# Altium PCB SL1 Xilinx Spartan-IIE PQ208 Rev1.02.PcbDoc (part 2 of 2)
Units mm, origin at the board's own origin, x right, y up, seen from the top; angles counter-clockwise.
Board outline 180.01 x 50.51 mm, 2 copper layers (Top Layer, Bottom Layer), stack 1.646 mm thick; 115 components, 126 nets, 642 pads, 225 vias.
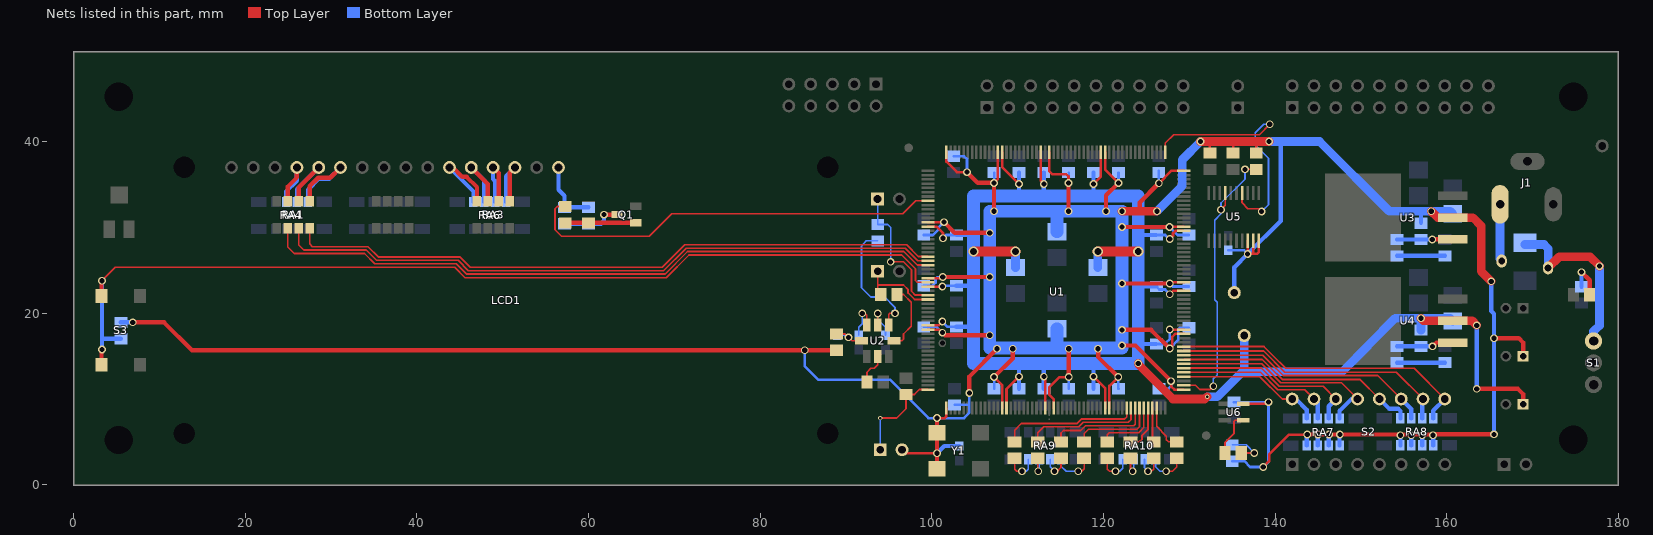
[diagram p2: the nets of this part, all layers, seen from the top]

## Via types
v1: diameter 0.9, hole 0.6, Top Layer to Bottom Layer, tented both sides, 166 vias
v2: diameter 1.5, hole 0.8, Top Layer to Bottom Layer, tented both sides, 27 vias
v3: diameter 1.2, hole 0.8, Top Layer to Bottom Layer, 18 vias
v4: diameter 1.2, hole 0.8, Top Layer to Bottom Layer, tented both sides, 11 vias
v5: diameter 0.5, hole 0.3, Top Layer to Bottom Layer, tented both sides, 2 vias
v6: diameter 0.9, hole 0.6, Top Layer to Bottom Layer, 1 vias

## Nets (pads, with @x,y where several pads share a name; then routed paths per layer and width w, separated by ;. In a path a pad name is that pad's centre, name@x,y a point inside that pad or via, vN(x,y) a via of type N, cw(c..) or ccw(c..) an arc to the next point about the centre after c; other vN are vias at no path point) (continued)
LCD_DB#4: LCD1.11 RA3.4 RA6.5 | length 11
  Top Layer w0.5: LCD1.11@43.8,37 44.2,37 45.297,35.903 45.797,35.903 46.995,34.705 RA3.4@46.995,33.075
  Bottom Layer w0.5: LCD1.11@43.8,37 46.595,34.205 RA6.5@46.595,32.975
LCD_DB#5: LCD1.12 RA3.3 RA6.6 | length 9.4
  Top Layer w0.5: LCD1.12@46.34,37 48.265,35.075 RA3.3@48.265,33.075
  Bottom Layer w0.5: LCD1.12@46.34,37 47.865,35.475 RA6.6@47.865,32.975
LCD_DB#6: LCD1.13 RA3.2 RA6.7 | length 8.3
  Top Layer w0.5: LCD1.13@48.88,37 49.535,36.345 RA3.2@49.535,33.075
  Bottom Layer w0.5: LCD1.13@48.88,37 48.88,35.655 49.135,35.4 RA6.7@49.135,32.975
LCD_DB#7: LCD1.14 RA3.1 RA6.8 | length 8.6
  Top Layer w0.5: RA3.1@50.805,33.075 50.805,36.385 LCD1.14@51.42,37
  Bottom Layer w0.5: RA6.8@50.405,32.975 50.405,35.985 LCD1.14@51.42,37
LCD_E: RA1.8 U1.21 | length 76.7
  Top Layer w0.2: RA1.8@27.505,29.925 27.505,28.095 27.825,27.775 34.3,27.775 35.5,26.575 45,26.575 46.2,25.375 68.575,25.375 71.2,28 97.059,28 98.434,26.625 U1.21@99.55,26.625
LCD_E#: LCD1.6 RA1.1 RA4.8 | length 12.5
  Top Layer w0.5: RA1.1@27.505,33.075 27.505,34.805 28.5,35.8 29.9,35.8 LCD1.6@31.1,37
  Bottom Layer w0.5: RA4.8@27.305,32.975 27.305,34.405 28.595,35.695 29.795,35.695 LCD1.6@31.1,37
LCD_LIGHT: R2.1 U1.8 | length 49.2
  Top Layer w0.2: R2.1@57.3,32.45 56.375,32.45 56.1,32.175 56.1,29.725 56.85,28.975 67.084,28.975 69.709,31.6 96.6,31.6 98.125,33.125 U1.8@99.55,33.125
LCD_RS: RA1.6 U1.23 | length 79.8
  Top Layer w0.2: RA1.6@24.965,29.925 24.965,27.735 25.725,26.975 33.9,26.975 35.1,25.775 44.6,25.775 45.8,24.575 68.907,24.575 71.532,27.2 96.725,27.2 98.3,25.625 U1.23@99.55,25.625
LCD_RS#: LCD1.4 RA1.3 RA4.6 | length 8.9
  Top Layer w0.5: RA1.3@24.965,33.075 24.965,34.79 26.02,35.845 LCD1.4@26.02,37
  Bottom Layer w0.5: RA4.6@24.765,32.975 24.765,34.195 26.02,35.45 LCD1.4@26.02,37
LCD_RW: RA1.7 U1.22 | length 78.2
  Top Layer w0.2: RA1.7@26.235,29.925 26.235,27.965 26.825,27.375 34.1,27.375 35.3,26.175 44.8,26.175 46,24.975 68.741,24.975 71.366,27.6 96.894,27.6 98.369,26.125 U1.22@99.55,26.125
LCD_RW#: LCD1.5 RA1.2 RA4.7 | length 10
  Top Layer w0.5: RA1.2@26.235,33.075 26.235,34.675 LCD1.5@28.56,37
  Bottom Layer w0.5: RA4.7@26.035,32.975 26.035,34.475 LCD1.5@28.56,37
LEDS0: LED0.1 U1.102 | length 5.5
  Top Layer w0.2: U1.102@126.2,8.975 126.2,6.825 127.325,5.7 127.325,5.275 127.575,5.025 LED0.1@128.55,5.025
LEDS1: LED1.1 U1.101 | length 4
  Top Layer w0.2: U1.101@125.7,8.975 125.7,8.875 125.7,5.175 LED1.1@125.85,5.025
LEDS2: LED2.1 U1.100 | length 5.4
  Top Layer w0.2: LED2.1@123.15,5.025 124.175,5.025 124.5,5.35 124.5,5.775 125.2,6.475 U1.100@125.2,8.975
LEDS3: LED3.1 U1.99 | length 7.7
  Top Layer w0.2: LED3.1@120.45,5.025 120.45,5.875 120.675,6.1 124.1,6.1 124.7,6.7 U1.99@124.7,8.975
LEDS4: LED4.1 U1.98 | length 9.9
  Top Layer w0.2: LED4.1@117.75,5.025 117.75,6 118.25,6.5 123.9,6.5 124.2,6.8 U1.98@124.2,8.975
LEDS5: LED5.1 U1.97 | length 12
  Top Layer w0.2: LED5.1@115.05,5.025 115.05,6.05 115.35,6.35 117.35,6.35 117.9,6.9 123.525,6.9 123.7,7.075 U1.97@123.7,8.975
LEDS6: LED6.1 U1.96 | length 13.9
  Top Layer w0.2: LED6.1@112.35,5.025 112.35,6.075 113.05,6.775 117.125,6.775 117.65,7.3 122.9,7.3 123.2,7.6 U1.96@123.2,8.975
LEDS7: LED7.1 U1.95 | length 16.1
  Top Layer w0.2: LED7.1@109.65,5.025 109.65,6.375 110.45,7.175 116.959,7.175 117.484,7.7 122.475,7.7 122.7,7.925 U1.95@122.7,8.975
M0: JP5.1 R7.2 U1.52 | length 11.6
  Top Layer w0.2: v5(94,7.8) 95.9,7.8 96.989,8.889 96.989,10.555 97.98,10.555 98.55,11.125 U1.52@99.55,11.125
  Bottom Layer w0.2: JP5.1@94,4.1 v5(94,7.8)
NetC15_1: C15.1 R11.2 U2.8 | length 4.6
  Top Layer w0.2: R11.2@88.88,17.6 89.9,17.6 90.7,16.8 U2.8@91.8,16.8
  Bottom Layer w0.2: C15.1@89,17.45 89.78,17.45 v1(90.3,17.2)
NetC16_1: C16.1 U2.6 | length 4.2
  Top Layer w0.2: U2.6@93.697,18.663 93.702,18.668 v1(93.702,19.988)
  Bottom Layer w0.2: v1(93.702,19.988) 93.702,19.28 94.6,18.383 C16.1@94.6,17.45
NetC19_1: C19.1 U2.7 | length 4.5
  Top Layer w0.2: v1(91.9,20) 92.2,20 92.43,19.77 U2.7@92.43,18.65
  Bottom Layer w0.2: C19.1@91.5,17.45 91.5,18.392 91.9,18.792 v1(91.9,20)
NetD1_2: D1.2 F1.2 S1.3 | length 21.2
  Top Layer w1: F1.2@171.8,25.3 173.1,26.6 176.7,26.6 v1(177.8,25.5)
  Bottom Layer w1: D1.2@169.1,28.022 171.325,28.025 171.8,27.55 F1.2@171.8,25.3 ; S1.3@177.1,16.78 177.1,17.9 177.8,18.58 v1(177.8,25.5)
NetLCD1_16: LCD1.16 R8.1 R9.1 | length 7.7
  Bottom Layer w0.5: LCD1.16@56.5,37 56.5,34.4 57.2,33.7 57.2,32.35 R9.1@60,32.35
NetLED0_2: LED0.2 RA10.5 | length 5.5
  Top Layer w0.2: v1(127.3,1.6) 128.05,1.6 128.55,2.1 LED0.2@128.55,3.125
  Bottom Layer w0.2: RA10.5@126.055,3 126.055,2.125 126.58,1.6 ; 126.58,1.6 v1(127.3,1.6) 126.58,1.6
NetLED1_2: LED1.2 RA10.6 | length 3.6
  Top Layer w0.2: v1(125.2,1.6) 125.6,1.6 125.85,1.85 LED1.2@125.85,3.125
  Bottom Layer w0.2: RA10.6@124.785,3 124.785,2.015 v1(125.2,1.6)
NetLED2_2: LED2.2 RA10.7 | length 3.1
  Top Layer w0.2: LED2.2@123.15,3.125 123.15,1.85 v1(123.4,1.6)
  Bottom Layer w0.2: v1(123.4,1.6) 123.515,1.715 RA10.7@123.515,3
NetLED3_2: LED3.2 RA10.8 | length 4.4
  Top Layer w0.2: LED3.2@120.45,3.125 120.45,1.85 120.7,1.6 v1(121.4,1.6)
  Bottom Layer w0.2: v1(121.4,1.6) 121.9,1.6 122.245,1.945 RA10.8@122.245,3
NetLED4_2: LED4.2 RA9.5 | length 5.1
  Top Layer w0.2: v1(117.055,1.6) 117.45,1.6 117.75,1.9 LED4.2@117.75,3.125
  Bottom Layer w0.2: RA9.5@115.055,3 115.055,2.2 115.655,1.6 v1(117.055,1.6)
NetLED5_2: LED5.2 RA9.6 | length 3.6
  Top Layer w0.2: v1(114.3,1.6) 114.6,1.6 115.05,2.05 LED5.2@115.05,3.125
  Bottom Layer w0.2: RA9.6@113.785,3 113.785,2.115 v1(114.3,1.6)
NetLED6_2: LED6.2 RA9.7 | length 3
  Top Layer w0.2: LED6.2@112.35,3.125 112.35,1.65 v1(112.4,1.6)
  Bottom Layer w0.2: v1(112.4,1.6) 112.515,1.715 RA9.7@112.515,3
NetLED7_2: LED7.2 RA9.8 | length 4.2
  Top Layer w0.2: LED7.2@109.65,3.125 109.65,1.85 109.9,1.6 v1(110.5,1.6)
  Bottom Layer w0.2: v1(110.5,1.6) 111,1.6 111.245,1.845 RA9.8@111.245,3
NetLED8_1: LED8.1 R20.1 | length 4.5
  Top Layer w0.2: LED8.1@136.05,3.725 v1(137.575,3.725)
  Bottom Layer w0.2: R20.1@135,4.675 136.625,4.675 v1(137.575,3.725)
NetLED8_2: LED8.2 U6.4 | length 5.2
  Top Layer w0.2: LED8.2@134.15,3.725 134.15,4.925 135.2,5.975 135.2,7.4 135.35,7.55 U6.4@136.275,7.55
NetLED9_1: LED9.1 R15.1 | length 4.7
  Top Layer w0.5: v1(175.7,24.8) 176.65,23.85 LED9.1@176.65,22.15
  Bottom Layer w0.5: R15.1@175.7,23.1 v1(175.7,24.8)
NetQ1_1: Q1.1 R2.2 R3.2 | length 8.2
  Top Layer w0.5: R2.2@57.3,30.55 Q1.1@65.5,30.55
NetQ1_3: Q1.3 R8.2 R9.2 | length 6.9
  Top Layer w0.5: v1(61.8,31.5) Q1.3@63.3,31.5
  Bottom Layer w0.5: R8.2@57.2,30.45 61.45,30.45 61.8,30.8 v1(61.8,31.5)
NetR10_2: R10.2 U2.2 | length 3.7
  Top Layer w0.2: R10.2@92.45,12 92.45,13.15 92.9,13.6 93.28,13.6 93.7,14.02 U2.2@93.7,14.95
NetR12_1: R12.1 R13.2 U3.1 | length 6.5
  Top Layer w0.5: v1@158.32,28.62 U3.1@160.7,28.62
  Bottom Layer w0.5: R12.1@154.2,28.6 157,28.6 v1(158.3,28.6)
NetR12_2: R12.2 R14.2 | length 5.6
  Bottom Layer w0.5: R12.2@154.2,26.7 R14.2@159.8,26.7
NetR17_1: R17.1 R18.2 U4.1 | length 6.7
  Top Layer w0.5: v1(158.35,16.15) 158.8,16.6 U4.1@160.7,16.6
  Bottom Layer w0.5: R17.1@154.2,16.15 v1(158.35,16.15)
NetR17_2: R17.2 R19.1 | length 5.6
  Bottom Layer w0.5: R17.2@154.2,14.25 R19.1@159.8,14.25
PROG_B: R6.2 U1.106 U5.7 | length 34.3
  Top Layer w0.2: U1.106@129.35,11.625 130.725,11.625 131.225,11.125 132.425,11.125 v1(132.8,11.5) ; v1(133.7,32.075) 134.2,32.575 U5.7@134.2,34 ; v1(136.5,36.775) R6.2@137.8,36.775
  Bottom Layer w0.2: v1(132.8,11.5) 132.8,12.359 133.25,12.809 133.25,21.297 132.975,21.572 132.975,30.867 133.7,31.592 133.7,32.85 136.5,35.65 v1(136.5,36.775)
PWR_IN: F1.1 J1.1 | length 7.9
  Bottom Layer w1: J1.1@166.2,33.95 166.2,26.35 F1.1@166.4,26.1
SW0: RA7.1 S2.16 U1.108 | length 17.8
  Top Layer w0.2: U1.108@129.35,12.625 138.225,12.625 140.83,10.02 S2.16@142,10.02
  Bottom Layer w0.5: S2.16@142,10.02 142.43,10.02 143.695,8.755 143.695,7.755 143.7,7.75 143.7,8.63
SW1: RA7.2 S2.15 U1.109 | length 20.6
  Top Layer w0.2: U1.109@129.35,13.125 138.3,13.125 140.325,11.1 143.46,11.1 S2.15@144.54,10.02
  Bottom Layer w0.5: S2.15@144.54,10.02 144.97,9.59 RA7.2@144.97,7.75 ; RA7.2@144.965,7.875 S2.15@144.965,9.595
SW2: RA7.3 S2.14 U1.110 | length 21.8
  Top Layer w0.2: U1.110@129.35,13.625 138.375,13.625 140.5,11.5 145.6,11.5 S2.14@147.08,10.02
  Bottom Layer w0.5: RA7.3@146.24,7.75 146.24,9.18 S2.14@147.08,10.02
SW3: RA7.4 S2.13 U1.111 | length 25.5
  Top Layer w0.2: U1.111@129.35,14.125 138.441,14.125 140.666,11.9 147.74,11.9 S2.13@149.62,10.02
  Bottom Layer w0.5: RA7.4@147.51,7.75 147.51,8.635 148.895,10.02 S2.13@149.62,10.02
SW4: RA8.1 S2.12 U1.112 | length 28.6
  Top Layer w0.2: U1.112@129.35,14.625 138.506,14.625 139.447,13.685 140.831,12.3 149.88,12.3 152.16,10.02 S2.12@152.13,10.02
  Bottom Layer w0.5: S2.12@152.16,10.02 153.309,8.871 154.346,8.871 154.6,8.617 RA8.1@154.6,7.75
SW5: RA8.2 S2.11 U1.113 | length 30.2
  Top Layer w0.2: U1.113@129.35,15.125 138.572,15.125 139.506,14.191 140.947,12.75 151.97,12.75 S2.11@154.7,10.02
  Bottom Layer w0.5: S2.11@154.7,10.02 155.87,8.85 RA8.2@155.87,7.75
SW6: RA8.3 S2.10 U1.114 | length 32.5
  Top Layer w0.2: U1.114@129.35,15.625 138.638,15.625 141.113,13.15 154.11,13.15 S2.10@157.24,10.02
  Bottom Layer w0.5: RA8.3@157.14,7.75 157.14,9.92 S2.10@157.24,10.02
SW7: RA8.4 S2.9 U1.115 | length 35.8
  Top Layer w0.2: U1.115@129.35,16.125 138.703,16.125 139.695,15.133 141.228,13.6 156.2,13.6 S2.9@159.78,10.02
  Bottom Layer w0.5: RA8.4@158.41,7.75 158.41,8.65 S2.9@159.78,10.02
TDI_C: U1.157 U5.4 | length 30.2
  Top Layer w0.2: U1.157@127.2,38.775 127.2,39.85 128.175,40.825 138.175,40.825 v1(139.375,42.025) ; U5.4@136.15,34 136.15,32.875 136.825,32.2 138.107,32.2 v1(138.43,31.877)
  Bottom Layer w0.2: v1(138.43,31.877) 139.225,32.672 139.225,38.065 137.7,39.59 137.7,41.05 138.675,42.025 v1(139.375,42.025)
TEST: R16.2 S3.1 S3.2 U1.27 | length 114.4
  Top Layer w0.2: v1(3.3,23.8) 4.865,25.365 44.4,25.365 45.615,24.15 69.05,24.15 71.7,26.8 96.5,26.8 98.1,25.2 98.1,23.825 98.3,23.625 U1.27@99.55,23.625
  Top Layer w0.5: S3.1@3.25,13.99 3.25,15.75 v1(3.3,15.8) ; S3.2@3.25,22 v1@3.25,23.75
  Bottom Layer w0.5: v1(3.3,15.8) v1(3.3,23.8) ; 3.3,17.05 R16.2@5.5,17.05
VCCINT: C3.1 C7.1 C8.1 C10.1 C20.1 C21.1 C25.1 C26.1 C28.1 C29.1 C30.1 C32.1 C34.2 C38.1 C39.1 C41.1 R18.1 TP3.1 U1.14 U1.28 U1.37 U1.67 U1.76 U1.90 U1.119 U1.128 U1.142 U1.172 U1.186 U1.195 U4.2 | length 236.6
  Top Layer w0.3: U1.37@99.548,18.613 100.788,18.613 v1(101.225,19.05) ; U1.28@99.548,23.113 v1@101.225,23.113 ; U1.14@99.548,30.113 100.537,30.113 101.3,29.35 v1(101.3,28.75) ; U1.195@108.198,38.763 108.198,37.027 v1(110.15,35.075) ; U1.67@108.698,8.963 108.698,11.173 v1(110.15,12.625) ; U1.186@112.698,38.763 112.698,35.427 v1(113.05,35.075) ; v1(113.05,12.625) 113.198,12.477 U1.76@113.198,8.963 ; v1(118.85,12.625) 120.198,11.277 U1.90@120.198,8.963 ; v1(118.85,35.075) 119.698,35.923 U1.172@119.698,38.763 ; v1@127.725,18.113 U1.119@129.348,18.113 ; v1(127.725,22.225) 128.113,22.613 U1.128@129.348,22.613 ; v1(127.725,28.65) 128.1,29.025 128.1,29.318 128.395,29.613 U1.142@129.348,29.613
  Top Layer w0.5: v1(163.5,11.2) 168.3,11.2 168.9,10.6 C3.1@168.9,9.4
  Top Layer w1: v1(124.05,14.175) 124.15,13.975 128.106,10.019 131.819,10.019 v5(132.075,10.275) ; v1(157,19.425) 157.285,19.14 162.96,19.14 v1(163.5,18.6)
  Top Layer w1.2: v4(104.85,27.2) v4(109.75,27.2) ; v4(119.35,27.2) v4(124.05,27.2)
  Bottom Layer w0.3: v1(101.225,19.05) 101.85,18.425 C32.1@102.85,18.425 ; v1(101.225,23.125) 101.225,23.225 C25.1@102.85,23.225 ; v1(101.3,28.75) 101.675,29.125 C20.1@102.85,29.125 ; C34.2@126.15,16.425 127.121,16.425 ; C26.1@126.15,23.125 126.5,22.775 127.175,22.775 v1(127.725,22.225) ; C21.1@126.15,29.125 127.175,29.125 127.65,28.65 v1(127.725,28.65) ; 127.111,16.436 127.21,16.535 ; 127.222,16.522 127.725,17.025 v1(127.725,18.125)
  Bottom Layer w0.5: C32.1@102.85,18.425 104.85,18.425 ; C25.1@102.85,23.225 104.85,23.225 ; C20.1@102.85,29.125 104.85,29.125 ; C38.1@110.15,11.225 v1(110.15,12.625) 110.15,13.975 ; 110.15,33.8 v1(110.15,35.075) C7.1@110.15,36.4 ; C39.1@113.05,11.225 113.05,13.975 ; 113.05,33.8 C8.1@113.05,36.4 ; C41.1@118.85,11.225 118.85,13.975 ; 118.85,33.8 C10.1@118.85,36.4 ; 124.05,16.425 C34.2@126.15,16.425 ; 124.05,23.125 C26.1@126.15,23.125 ; 124.05,29.125 C21.1@126.15,29.125 ; v1(163.5,11.2) v1(163.5,18.6)
  Bottom Layer w1: C28.1@109.75,25.325 v4(109.75,27.2) ; C29.1@119.35,25.325 v4(119.35,27.2) ; v5(132.075,10.275) 133.275,10.275 136.175,13.175 147.8,13.175 153.975,19.425 160.375,19.425 C30.1@160.7,19.1 ; 136.4,13.175 TP3.1@136.4,17.4 ; R18.1@157,18.05 v1(157,19.425)
  Bottom Layer w1.5: 104.85,14.175 v1(124.05,14.175) 124.05,33.675 118.85,33.675 104.85,33.675 v4(104.85,27.2) 104.85,14.175
VCCO: C2.1 C4.1 C5.2 C6.1 C9.1 C11.1 C12.1 C14.1 C17.2 C18.2 C22.2 C23.1 C24.2 C31.1 C33.1 C35.1 C36.2 C37.1 C40.1 C42.1 C43.1 C44.2 C45.1 JP5.2 R4.1 R5.1 R6.1 R11.1 R13.1 R16.1 R20.2 RA7.5 RA7.6 RA7.7 RA7.8 RA8.5 RA8.6 RA8.7 RA8.8 TP2.1 U1.13 U1.26 U1.38 U1.53 U1.66 U1.78 U1.91 U1.105 U1.118 U1.130 U1.143 U1.156 U1.171 U1.184 U1.196 U1.208 U3.2 U5.18 U5.19 U5.20 U6.5 Y1.1 Y1.4 | length 536.7
  Top Layer w0.3: JP5.2@96.54,4.1 96.94,3.7 v1(100.6,3.7) ; U1.38@99.548,18.113 100.862,18.113 v1@101.525,17.45 ; U1.26@99.548,24.113 101.163,24.113 v1(101.275,24.225) v1@101.4,24.225 ; U1.13@99.548,30.613 v1@101.425,30.613 ; v1(100.6,7.8) 101.5,7.8 101.698,7.998 U1.53@101.698,8.963 ; U1.208@101.698,38.763 101.698,37.677 102.925,36.45 v1(104.1,36.45) ; v1(107.25,12.575) 108.198,11.627 U1.66@108.198,8.963 ; v1(107.25,35.2) 107.698,35.648 U1.196@107.698,38.763 ; U1.184@113.698,38.763 113.698,36.552 114.025,36.225 115.65,36.225 115.925,35.95 v1(115.925,35.2) ; U1.78@114.198,8.963 114.198,10.002 113.7,10.5 113.7,11.4 114.875,12.575 v1(115.95,12.575) ; U1.171@120.198,38.763 120.198,36.752 v1(121.75,35.2) ; U1.91@120.698,8.963 120.698,11.548 v1(121.725,12.575) ; v1(126.45,35.15) 127.925,36.625 U1.156@129.35,36.625 ; v1(127.7,30.05) 127.7,30.113 U1.143@129.348,30.113 ; v1(127.725,15.9) 128.017,16.192 128.017,17.273 128.357,17.613 U1.118@129.348,17.613 ; v1(127.725,23.475) v1@127.875,23.625 ; v1(127.875,12.1) 127.875,11.5 128.262,11.113 U1.105@129.348,11.113 ; v1@127.887,23.613 U1.130@129.348,23.613 ; R4.1@132.4,38.675 132.4,39.85 ; R5.1@135.1,38.675 135.1,39.85 ; U6.5@136.275,9.45 139.025,9.45 v1(139.225,9.65) ; U5.18@136.8,28.45 v1(136.8,26.925) 137.9,26.925 138.1,27.125 U5.20@138.1,28.45 ; 137.45,26.925 U5.19@137.45,28.45 ; R6.1@137.8,38.675 137.8,40.075 137.825,40.1 ; v1(138.625,2.1) 139.298,2.773 139.298,3.558 141.615,5.875 v1(143.735,5.875)
  Top Layer w0.5: v1(6.9,18.95) 10.55,18.95 13.8,15.7 v1(85.2,15.7) R11.1@88.88,15.7 ; Y1.1@100.6,1.6 v1(100.6,7.8) ; v1(101.275,24.225) v1(106.75,24.225) ; v1(101.425,30.625) 102.675,29.375 v1(106.75,29.375) ; v1@101.525,17.45 v1(106.75,17.45) ; v1(104.1,36.45) 105.35,35.2 v1(107.25,35.2) v1(107.25,31.9) ; v1(104.375,10.725) 104.375,12.65 v1(107.6,15.875) ; v1(107.25,12.575) 109.425,14.75 v1(109.425,15.875) ; v1(115.925,31.9) v1(115.925,35.2) ; v1(115.95,12.575) v1(115.95,15.875) ; v1(119.375,15.875) 119.375,14.925 v1(121.725,12.575) ; v1(120.3,31.9) 120.3,33.75 v1(121.75,35.2) ; v1(122.15,16.25) 123.725,16.25 v1(127.875,12.1) ; v1(122.15,18.075) 125.55,18.075 v1(127.725,15.9) ; v1(122.15,23.475) v1(127.725,23.475) ; v1(122.15,30.05) v1(127.7,30.05) ; 124.225,31.9 124.225,32.925 v1(126.45,35.15) ; v1(131.3,40.025) 131.55,39.85 137.55,39.85 ; v1(143.735,5.875) v1@158.445,5.875 ; v1(158.4,5.8) 158.5,5.9 v1(165.5,5.9) ; v1(165.5,17.1) 168.4,17.1 168.9,16.6 C2.1@168.9,15
  Top Layer w1: v1(122.15,31.9) v1(126.225,31.9) ; v1(131.3,40.025) v1(139.3,40.025) ; v1(158.2,31.9) 158.94,31.16 163.04,31.16 164,30.2 164,24.9 v1(165.175,23.725)
  Bottom Layer w0.3: v1(85.2,15.7) 85.2,13.825 86.75,12.275 95.15,12.275 99.6,7.8 103.75,7.8 104.375,8.425 v1(104.375,10.725) ; C31.1@99.05,18.425 100.55,18.425 v1(101.225,17.75) ; C22.2@99.05,23.225 100.075,23.225 100.425,23.575 100.425,23.975 100.675,24.225 v1(101.275,24.225) ; C17.2@99.05,29.125 100.125,29.125 100.725,29.725 100.725,29.925 v1(101.425,30.625) ; C5.2@102.55,38.3 103.775,38.3 104.1,37.975 v1(104.1,36.45) ; C36.2@102.65,9.325 104.375,9.325 ; C37.1@107.25,11.225 v1(107.25,12.575) ; v1(107.25,35.2) C6.1@107.25,36.4 ; v1(115.925,35.2) C9.1@115.95,36.4 ; C40.1@115.95,11.225 v1(115.95,12.575) ; v1(121.725,12.575) 121.725,11.25 C42.1@121.75,11.225 ; v1(121.75,35.2) C11.1@121.75,36.4 ; C43.1@126.45,11.225 127.575,11.225 127.875,11.525 v1(127.875,12.1) ; v1(126.45,35.15) C12.1@126.45,36.625 ; v1(127.7,30.05) 128.625,29.125 C18.2@129.95,29.125 ; v1(127.725,15.9) 128.7,16.875 128.7,18.125 128.9,18.325 C35.1@129.95,18.325 ; v1(127.725,23.475) 128.075,23.125 C24.2@129.95,23.125 ; C4.1@134.525,27.35 136.375,27.35 v1(136.8,26.925) ; R20.2@135,2.775 136.425,2.775 137.1,2.1 v1(138.625,2.1) 139.225,2.7 v1(139.225,9.65) C44.2@135.2,9.65
  Bottom Layer w0.5: R16.1@5.5,18.95 v1(6.9,18.95) ; v1(100.6,3.7) 101.45,4.55 C45.1@103.2,4.55 ; TP2.1@135.233,22.4 135.233,25.358 v1(136.8,26.925) 140.65,30.75 140.65,40.025 v1(139.3,40.025) ; RA7.8@143.7,4.6 v1@143.7,5.84 ; RA7.7@144.97,4.6 v1@144.97,5.84 ; RA7.6@146.24,4.6 v1@146.24,5.84 ; RA7.5@147.51,4.6 v1@147.51,5.84 ; RA8.8@154.6,4.6 v1@154.6,5.84 ; RA8.7@155.87,4.6 v1@155.87,5.84 ; R13.1@157,30.55 157,31.925 ; RA8.6@157.14,4.6 v1@157.14,5.84 ; RA8.5@158.41,4.6 v1@158.41,5.84 ; v1(165.175,23.725) 165.175,20.275 165.5,19.95 v1(165.5,17.1) v1(165.5,5.9)
  Bottom Layer w1: v1(126.225,31.9) 129.175,34.85 129.175,37.9 v1(131.3,40.025) ; v1(139.3,40.025) 145.175,40.025 153.3,31.9 160.4,31.9 C14.1@160.7,31.6
  Bottom Layer w1.5: 114.6,16 C33.1@114.6,18.2 ; C23.1@114.6,29.5 114.6,31.9 ; 114.6,31.9 v1(122.15,31.9) 122.15,15.975 106.75,15.975 v1(106.75,17.45) v1(106.75,24.225) 106.75,31.9 v1(107.25,31.9) 114.6,31.9
  other v1: 154.59,5.8 155.86,5.8 157.13,5.8 145.005,5.875 146.275,5.875 147.545,5.875
XOUT: R22.2 U2.5 | length 15
  Top Layer w0.2: U2.5@94.97,18.65 94.97,19.57 94.97,19.87 95.1,20 v1(95.7,20)
  Bottom Layer w0.2: R22.2@93.711,28.455 92.355,28.455 91.8,27.8 91.8,23 92.9,21.9 94.514,21.9 95.7,20.714 v1(95.7,20) v1@95.4,20.3
XOUT_ALT: JP3.1 R22.1 U1.30 | length 16
  Top Layer w0.2: v1(95.2,26) 96.7,26 97.633,25.067 97.633,22.567 98.075,22.125 U1.30@99.55,22.125
  Bottom Layer w0.2: JP3.1@93.693,33.31 93.693,30.373 93.711,30.355 94.845,30.355 95.2,30 v1(95.2,26)
YOUT: R21.2 U2.4 | length 7.9
  Top Layer w0.2: U2.4@95.6,16.8 96.5,16.8 96.7,17 96.7,17.6 97.6,18.5 97.6,21.286 96.697,22.189 R21.2@95.945,22.189
YOUT_ALT: JP4.1 R21.1 U1.31 | length 9.6
  Top Layer w0.2: JP4.1@93.693,24.91 93.693,22.54 R21.1@94.045,22.189 ; 93.793,23.3 96.7,23.3 97.233,22.767 97.233,22.367 97.975,21.625 U1.31@99.55,21.625
pads on no net: HDR2.1 HDR3.1 LCD1.M1 LCD1.M2 LCD1.M3 LCD1.M4 RA1.4 RA1.5 RA4.5 RA4.STP RA5.STP RA6.STP RA7.STP RA8.STP RA9.STP RA10.STP U1.3 U1.24 U1.29 U1.33 U1.34 U1.35 U1.36 U1.40 U1.41 U1.42 U1.43 U1.44 U1.45 U1.46 U1.47 U1.48 U1.49 U1.55 U1.56 U1.57 U1.58 U1.59 U1.60 U1.61 U1.62 U1.63 U1.64 U1.68 U1.69 U1.70 U1.71 U1.73 U1.74 U1.75 U1.81 U1.82 U1.83 U1.84 U1.86 U1.87 U1.88 U1.89 U1.93 U1.94 U1.116 U1.139 U1.140 U1.141 U1.145 U1.146 U1.147 U1.148 U1.149 U1.150 U1.151 U1.152 U1.154 U1.192 U1.193 U1.194 U1.198 U1.199 U1.200 U1.201 U1.202 U1.203 U1.204 U1.205 U1.206 U1.FID1 U1.FID2 U2.0 U2.1 U3.4 U4.4 U5.2 U5.9 U5.12 U5.13 U5.14 U5.15 U5.16 U6.1

## Polygon pours and split planes (outlines as drawn)
GND on Top Layer "Top Layer-GND" (solid, remove dead copper, pour order 1000): 0,0 0,50.5 180,50.5 180,0
GND on Bottom Layer "Bottom Layer-GND" (solid, remove dead copper, pour order 1001): 179.995,0 179.995,50.5 -0.005,50.5 -0.005,0

## Keep-outs
Keep-Out Layer:
  circle w0.2: c174.75,45.25 r4
  circle w0.2: c5.25,45.25 r4
  circle w0.2: c174.75,5.275 r4
  circle w0.2: c5.25,5.25 r4
  lines w0.635: 0,0 180,0 180,50.5 0,50.5 0,0

## Silkscreen, mask and mechanical layers (free items; w line width, h text height)
Top Overlay:
  drawing of 3334 lines, arcs and shapes, not listed
  text "SL" at 54.182,46.321 h1.3
  text "REV 1.02" at 59.262,46.321 h1.3
  text "CONTRAST" at 1.9,26.6 h1
  text "PWR" at 179.324,20.574 h1.2 r90
  text "TEST/" at 3.6,11.5 h1
  text "RESET" at 3.4,9.8 h1
  text "7" at 109.6,6.5 h1.2
  text "6" at 112,6.5 h1.2
  text "5" at 114.7,6.5 h1.2
  text "4" at 117.3,6.5 h1.2
  text "3" at 120.1,6.5 h1.2
  text "2" at 122.7,6.5 h1.2
  text "1" at 125.5,6.5 h1.2
  text "0" at 128.1,6.5 h1.2
  text "DONE" at 132.968,0.946 h1.2
Unit PCB Boundary:
  lines w0.2: 0,0 0,50.5 180,50.5 180,0 0,0
  text "PCB boundary coincides with centre-line of tracks" at 0,-10 h0.75
Overlay boundary:
  lines w0.2: 0.508,0.508 179.492,0.508 179.5,50.025 0.508,50.038 0.508,0.508
  text "PCB boundary coincides with centre-line of tracks" at 0,-10 h0.75
LayerID:
  text ".Printout_Name" at 0,-6 h0.75
Dimensions:
  text "Dimensions in millimetres (mm)" at 0,-8 h0.75
Design Information:
  drawing of 719 lines, arcs and shapes, not listed
  text "Spirit Level Rev 1.01" at 282.247,157.974 h1.27
  text "DESIGN INFORMATION" at 226.24,157.847 h1.52
  text "BOARD NAME:" at 263.832,157.847 h1.52
  text "BOARD TECHNOLOGY" at 226.24,155.307 h1.52
  text "BOARD SIZE (REFER ALSO PROFILING INFORMATION)" at 274.5,155.307 h1.27
  text "50.50mm" at 282.22,153.033 h1.52
  text "15.000" at 242.039,152.945 h1.52
  text "180.00mm" at 305.22,152.933 h1.52
  text "7.874" at 256.009,152.818 h1.52
  text "7.874" at 229.066,152.767 h1.52
  text "(Unit)" at 321.29,152.709 h1.52
  text "X" at 298.169,152.259 h1.78
  text "(MIN. TRACK/   PADS  /CLEARANCE IN 0.001'')" at 224.716,150.227 h1.27
  text "MINIMUM ANNULAR RING 0.05MM (0.002'') EXTERNAL PER IPC-2221 CLASS 3 LEVEL C AND IS THE" at 226.24,147.687 h1.27
  text "MANUFACTURING REGISTRATION ALLOWANCE" at 226.24,145.401 h1.27
  text "LAND SIZE CALCULATION MINIMUM - NOMINAL HOLE SIZE + 0.508MM (0.020'')" at 226.24,142.607 h1.27
  text "AS INSTRUCTED" at 312.27,138.213 h1.52
  text "X" at 263.883,138.086 h1.52
  text "CIRCUIT TYPE:" at 226.24,138.035 h1.52
  text "SS" at 249.1,138.035 h1.27
  text "DS" at 266.88,138.035 h1.27
  text "X" at 281.485,138.035 h1.52
  text "PTH" at 284.66,138.035 h1.27
  text "ML" at 295.582,138.035 h1.27
  text "X" at 299.392,138.035 h1.52
  text "No. OFF" at 302.44,138.035 h1.27
  text "FINGER CONNECTOR DIM PER:" at 226.24,134.987 h1.52
  text "AS SHOWN" at 302.44,134.987 h1.27
  text "No. OFF TOTAL" at 243.004,132.193 h1.52
  text "ONE SIDE" at 284.66,132.193 h1.27
  text "BOTH SIDES" at 302.44,131.939 h1.27
  text "VIAS:" at 226.24,129.272 h1.52
  text "NONE" at 237.67,129.272 h1.14
  text "X" at 246.052,129.272 h1.52
  text "FEED THRU'" at 249.1,129.272 h1.14
  text "X" at 263.832,129.272 h1.52
  text "TENTED" at 266.88,129.272 h1.14
  text "BURIED LAYER SEQUENCE" at 284.66,129.272 h1.14
  text "UNIQUE DRILL" at 249.1,126.224 h1.14
  text "2 SIZE" at 266.88,126.224 h1.14
  text "BLIND LAYER SEQUENCE" at 284.66,126.224 h1.14
  text "Layer Stack Manager (Protel)" at 261.673,123.938 h1.27
  text "X" at 299.392,123.938 h1.52
  text "AS SHOWN" at 302.44,123.938 h1.27
  text "LAYER CONSTRUCTION PER:" at 226.24,123.811 h1.52
  text "Protel" at 307.266,121.271 h1.27
  text "(PFW)" at 317.553,121.144 h1.27
  text "ARTWORK:" at 226.24,121.017 h1.52
  text "MANUAL" at 249.1,121.017 h1.27
  text "DIGITISED" at 266.88,121.017 h1.27
  text "X" at 281.612,121.017 h1.52
  text "CAD" at 284.66,121.017 h1.27
  text "TYPE" at 295.582,121.017 h1.27
  text "ARTWORK/PATTERN MASTER LIST" at 226.24,116.318 h1.52
  text "DESCRIPTION" at 227.51,113.905 h1.27
  text "DRAWING No./CAD FILE REF." at 246.179,113.905 h1.27
  text "LAYER NAME" at 287.454,113.905 h1.27
  text "GERBER FILE REF" at 308.206,113.829 h1.27
  text "PCB FILE" at 225.956,111.441 h1.27
  text "SpiritLevel_2E_Rev1_01" at 246.327,111.365 h1.27
  text "PcbDoc" at 277.569,111.365 h1.02
  text "Top Paste Mask" at 285.748,108.901 h1.02
  text "GTP" at 328.369,108.825 h1.27
  text "GERBER FILE" at 225.956,108.774 h1.27
  text "GTO" at 328.318,106.336 h1.27
  text "Top Overlay" at 285.748,106.31 h1.02
  text "GERBER FILE" at 225.956,106.234 h1.27
  text "Top Solder Mask" at 285.748,103.872 h1.02
  text "GTS" at 328.369,103.745 h1.27
  text "GERBER FILE" at 225.956,103.694 h1.27
  text "TOP LAYER" at 285.748,101.281 h1.02
  text "GTL" at 328.369,101.205 h1.27
  text "GERBER FILE" at 225.956,101.154 h1.27
  text "BOTTOMLAYER" at 285.748,98.801 h1.02
  text "GBL" at 328.369,98.725 h1.27
  text "GERBER FILE" at 225.956,98.614 h1.27
  text "Bottom Solder Mask" at 285.748,96.312 h1.02
  text "GBS" at 328.369,96.185 h1.27
  text "GERBER FILE" at 225.956,96.074 h1.27
  text "Bottom Overlay" at 285.748,93.721 h1.02
  text "GBO" at 328.369,93.645 h1.27
  text "GERBER FILE" at 225.956,93.534 h1.27
  text "Bottom Paste Mask" at 285.748,91.232 h1.02
  text "GBP" at 328.369,91.105 h1.27
  text "GERBER FILE" at 225.956,90.994 h1.27
  text "PCB Boundary" at 285.748,88.641 h1.02
  text "GM1" at 328.369,88.565 h1.27
  text "GERBER FILE" at 225.956,88.454 h1.27
  text "Plated Route Details" at 285.748,86.121 h1.02
  text "GM2" at 328.369,86.045 h1.27
  text "GERBER FILE" at 225.956,85.914 h1.27
  text "APERTURE LIST" at 225.956,83.411 h1.27
  text "APR" at 278.569,83.335 h1.27
  text "DRILL REPORT" at 225.956,80.871 h1.27
  text "DRR" at 278.569,80.795 h1.27
  text "EXCELLON DRILL" at 225.956,78.331 h1.27
  text "TXT" at 278.569,78.255 h1.27
  text "MATERIAL:" at 226.24,55.231 h1.52
  text "GLASS FIBRE EPOXY RESIN NEMA GRADE FR4 (MIL-S-13949H)" at 251.894,54.977 h1.27
  text "X" at 249.227,54.85 h1.52
  text "THICKNESS:" at 234.114,52.056 h1.27
  text "0.8mm" at 251.894,52.056 h1.27
  text "1.2mm" at 269.547,52.056 h1.27
  text "1.6mm" at 287.2,52.056 h1.27
  text "2.4mm" at 304.98,52.056 h1.27
  text "3.2mm" at 322.76,52.056 h1.27
  text "X" at 284.787,51.929 h1.52
  text "TOLERANCE:" at 233.987,49.008 h1.27
  text "IN A/W IPC-D-300G CLASS" at 251.64,49.008 h1.27
  text "3 LEVEL B" at 286.565,49.008 h1.27
  text "OTHER +/-" at 304.98,49.008 h1.27
  text "X" at 249.227,48.881 h1.52
  text "BOW & TWIST:" at 231.574,45.96 h1.27
  text "IN A/W IPC-D-300G CLASS" at 251.64,45.96 h1.27
  text "3 LEVEL B" at 286.565,45.96 h1.27
  text "AS SHOWN" at 305.107,45.833 h1.27
  text "X" at 249.227,45.706 h1.52
  text "COPPER THICKNESS (FINISHED)" at 233.987,42.658 h1.27
  text "OUTER:" at 238.813,40.372 h1.27
  text "18um" at 251.894,40.372 h1.27
  text "35um" at 278.945,40.372 h1.27
  text "70um" at 305.234,40.372 h1.27
  text "X" at 276.202,40.169 h1.52
  text "INNER SIGNAL:" at 230.431,37.324 h1.27
  text "18um" at 251.894,37.324 h1.27
  text "35um" at 278.945,37.324 h1.27
  text "70um" at 305.234,37.324 h1.27
  text "INNER PWR:" at 234.114,34.276 h1.27
  text "18um" at 251.894,34.276 h1.27
  text "35um" at 278.945,34.276 h1.27
  text "70um" at 305.234,34.276 h1.27
  text "STRUCTURE:" at 226.24,31.228 h1.52
  text "REFER" at 251.894,31.228 h1.27
  text "AS PER DRAWING No." at 251.767,28.053 h1.27
  text "AS SHOWN" at 305.107,28.053 h1.27
  text "X" at 302.567,27.926 h1.52
  text "DRILLING:" at 226.24,25.259 h1.52
  text "VIEWED FROM:" at 231.193,22.973 h1.27
  text "COMPONENT SIDE" at 251.894,22.973 h1.14
  text "SOLDER SIDE" at 278.691,22.973 h1.14
  text "X" at 249.227,22.719 h1.52
  text "REFERENCE:" at 233.479,19.925 h1.27
  text "AS SHOWN" at 251.767,19.798 h1.14
  text "PATTERN MASTER LIST" at 278.818,19.798 h1.14
  text "X" at 302.567,19.798 h1.52
  text "NC_DRILL FILES" at 305.107,19.798 h1.14
  text "X" at 249.227,19.671 h1.52
  text "PTH MINIMUM COPPER THICKNESS:" at 239.321,16.877 h1.27
  text "20um" at 278.945,16.877 h1.27
  text "X" at 276.278,16.75 h1.52
  text "OTHER" at 305.107,16.75 h1.27
  text "NPTH:" at 239.829,13.829 h1.27
  text "TENTED" at 251.767,13.702 h1.14
  text "X" at 276.278,13.702 h1.52
  text "PADS REMOVED" at 278.818,13.702 h1.14
  text "REMOVE PADS" at 305.107,13.702 h1.14
  text "X" at 249.227,13.575 h1.52
  text "2nd DRILL" at 251.767,10.654 h1.14
  text "BOTH" at 278.818,10.654 h1.14
  text "AS SHOWN" at 291.137,10.654 h1.14
  text "NONE" at 305.107,10.654 h1.14
  text "BOARD FINISH:" at 226.24,7.733 h1.52
  text "X" at 249.227,7.606 h1.52
  text "ETCHING" at 251.767,7.606 h1.14
  text "REFER PATTERN MASTER LIST" at 278.818,7.606 h1.14
  text "LEGEND / SCREEN PRINT:" at 246.56,4.685 h1.27
  text "NONE" at 278.818,4.558 h1.14
  text "COMPONENT" at 291.137,4.558 h1.14
  text "SOLDER" at 305.107,4.558 h1.14
  text "X" at 288.597,4.431 h1.52
  text "X" at 302.567,4.431 h1.52
  text "COLOUR:" at 236.781,1.637 h1.27
  text "WHITE" at 251.767,1.51 h1.14
  text "YELLOW" at 278.818,1.51 h1.14
  text "OTHER" at 305.107,1.51 h1.14
  text "X" at 249.227,1.383 h1.52
  text "X" at 249.227,-1.538 h1.52
  text "LIQUID PHOTOIMAGEABLE" at 251.767,-1.538 h1.14
  text "SCREEN PRINT" at 291.137,-1.538 h1.14
  text "MATTE" at 251.767,-4.586 h1.14
  text "GLOSS" at 264.467,-4.586 h1.14
  text "GREEN" at 278.818,-4.586 h1.14
  text "BLUE" at 291.137,-4.586 h1.14
  text "G/Y" at 305.107,-4.586 h1.14
  text "OTHER" at 316.537,-4.586 h1.14
  text "X" at 261.8,-4.713 h1.52
  text "SOLDER MASK COLOUR:" at 226.24,-7.507 h1.14
  text "BLACK" at 251.767,-7.634 h1.14
  text "GREEN" at 264.467,-7.634 h1.14
  text "YELLOW" at 278.818,-7.634 h1.14
  text "BLUE" at 291.137,-7.634 h1.14
  text "OTHER" at 305.107,-7.634 h1.14
  text "X" at 249.1,-7.761 h1.52
  text "TRACK FINISH:" at 226.24,-10.555 h1.52
  text "SELECTIVE SOLDER (HASL)" at 251.767,-10.682 h1.14
  text "REFLOW SOLDER" at 291.137,-10.682 h1.14
  text "X" at 249.152,-10.757 h1.52
  text "SELECTIVE GOLD" at 251.767,-13.73 h1.14
  text "um  (AREA" at 278.818,-13.73 h1.14
  text "sq. mm)" at 306.631,-13.73 h1.14
  text "REFER PATTERN MASTER LIST" at 251.767,-16.778 h1.14
  text "OTHER" at 291.137,-16.778 h1.14
  text "EDGE BOARD" at 226.24,-19.699 h1.52
  text "1.3um HARD GOLD OVER 5um     NICKEL / TIN-NICKEL" at 251.767,-19.826 h1.14
  text "CONTACTS:" at 226.24,-21.858 h1.52
  text "HARD FINISH GOLDE PLATE" at 251.767,-22.874 h1.14
  text "OTHER" at 291.137,-22.874 h1.14
  text "AS SHOWN" at 251.767,-25.922 h1.14
  text "REFER" at 291.137,-25.922 h1.14
  text "PROFILING:" at 226.24,-28.97 h1.52
  text "AS DIMENSIONED, MEASURED AND CUT FROM SPECIFIED DATUM." at 251.767,-28.97 h1.14
  text "X" at 249.227,-29.097 h1.52
  text "REFER PCB BLANK DWG No." at 251.894,-31.891 h1.27
  text "USE PROFILE / ROUTE TAPE SUPPLIED (REFER PATTERN MASTER LIST)" at 251.894,-34.939 h1.27
  text "SQUARE CUT" at 251.894,-37.987 h1.27
  text "N.C. ROUTE" at 269.674,-37.987 h1.27
  text "V. SCORE" at 287.454,-37.987 h1.27
  text "BLANK" at 305.234,-37.987 h1.27
  text "ACCEPTABILITY:" at 226.24,-40.654 h1.52
  text "MATERIALS AND WORKMANSHIP FOR ALL PRINTED WIRING BOARDS TO MEET" at 248.465,-40.781 h1.27
  text "OR EXCEED THE REQUIREMENTS OF:" at 248.465,-43.575 h1.27
  text "IPC-6011/12 AND IPC-A-600E" at 252.021,-46.242 h1.27
  text "1" at 287.581,-46.242 h1.27
  text "2" at 296.471,-46.242 h1.27
  text "X" at 293.804,-46.369 h1.52
  text "X" at 249.354,-46.496 h1.52
  text "3" at 305.361,-48.401 h1.27
  text "UL CERTIFICATION" at 252.021,-49.29 h1.27
  text "AUSTEL" at 287.581,-49.29 h1.27
  text "X" at 249.354,-49.417 h1.52
  text "ML-P-55110F GRP" at 251.513,-52.338 h1.02
  text "A" at 269.801,-52.338 h1.27
  text "B" at 278.691,-52.338 h1.27
  text "AS2546" at 287.581,-52.338 h1.27
  text "OTHER" at 305.361,-52.338 h1.27
  text "ADDITIONAL" at 226.24,-55.259 h1.52
  text "NONE" at 252.021,-55.513 h1.27
  text "SAMPLE PLAN" at 269.801,-55.513 h1.27
  text "MIL-P-55110E SERIAL Nos. PER ORDER" at 287.581,-55.513 h1.27
  text "REQUIREMENTS:" at 226.24,-57.672 h1.52
  text "NONE" at 252.021,-58.561 h1.27
  text "ML-P-55110F GRP" at 269.293,-58.561 h1.02
  text "A" at 287.581,-58.561 h1.27
  text "B" at 296.471,-58.561 h1.27
  text "IPC CLASS:" at 302.44,-58.561 h1.27
  text "1" at 317.934,-58.561 h1.27
  text "2" at 324.284,-58.561 h1.27
  text "3" at 330.634,-58.561 h1.27
  text "QUALITY RELEASE REPORT" at 269.801,-61.609 h1.27
  text "OTHER" at 310.314,-61.609 h1.27
  text "PER ORDER" at 318.823,-61.736 h1.27
  text "X" at 307.647,-61.863 h1.52
  text "NONE" at 269.801,-64.657 h1.27
  text "REQUIRED" at 287.581,-64.657 h1.27
  text "PER ORDER" at 310.441,-64.657 h1.27
  text "ELECTRICAL TEST:" at 226.24,-64.784 h1.52
  text "X" at 284.914,-64.784 h1.52
  text "NONE" at 269.801,-67.705 h1.27
  text "1 SIDE" at 287.454,-67.705 h1.14
  text "2 SIDES" at 298.63,-67.705 h1.14
  text "MIN. PITCH" at 310.314,-67.705 h1.27
  text "0.65mm" at 323.903,-67.705 h1.27
  text "SURFACE MOUNT:" at 226.24,-67.832 h1.52
  text "X" at 296.395,-67.908 h1.52
  text "NONE" at 269.801,-70.753 h1.27
  text "FOIL" at 287.581,-70.753 h1.27
  text "LEGEND" at 299.011,-70.753 h1.27
  text "REFER" at 310.314,-70.753 h1.27
  text "MANUFACTURER'S ID/LOGO:" at 226.24,-70.88 h1.52
  text "ISO9001/AS3901" at 273.611,-73.801 h1.27
  text "NONE" at 310.314,-73.801 h1.27
  text "MANUFACTURER'S ACCREDITATION:" at 226.24,-73.928 h1.52
  text "X" at 270.944,-73.928 h1.52
  text "PER ORDER" at 269.801,-76.849 h1.27
  text "REFER" at 287.581,-76.849 h1.27
  text "PACKAGING AND HANDLING:" at 226.24,-76.976 h1.52
  text "X" at 267.134,-77.103 h1.52
WS Board Travel:
  lines w0.2: 84.42,-6.5 84.42,-8.4 86.32,-6.5 87,-6.5 ; 86.4,-8.4 88.3,-6.5 ; 88.4,-8.4 90.3,-6.5 ; 90.4,-8.4 92.3,-6.5 ; 92.4,-8.4 94.3,-6.5 ; 94.4,-8.4 96.655,-6.155
  lines w0.203: 84.42,-8.4 94.7,-8.4 94.7,-10.8 98,-7.5 94.7,-4.2 94.7,-6.5 84.42,-6.5
  text "BOARD TRAVEL" at 81.56,-13.19 h1.5
Mechanical 15:
  lines w0.2: 0.3,40.7 180,40.7
Sheet Detail:
  drawing of 1882 lines, arcs and shapes, not listed
  text "1" at -27.183,163.091 h1.78
  text "2" at 21.856,163.091 h1.78
  text "3" at 71.115,163.091 h1.78
  text "4" at 120.408,163.091 h1.78
  text "5" at 169.684,163.091 h1.78
  text "6" at 218.706,163.091 h1.78
  text "7" at 268.236,163.091 h1.78
  text "8" at 317.258,163.091 h1.78
  text "A" at -49.315,129.106 h1.78
  text "A" at 339.305,129.106 h1.78
  text "B" at -49.315,58.494 h1.78
  text "B" at 339.305,58.494 h1.78
  text "C" at -49.315,-12.118 h1.78
  text "C" at 339.305,-12.118 h1.78
  text "D" at -49.315,-82.222 h1.78
  text "D" at 339.305,-82.222 h1.78
  text "ENGINEER:" at 224.37,-82.4 h1.14
  text "TITLE:" at 262.47,-82.4 h1.14
  text "PCB DESIGNER:" at 224.37,-89.893 h1.14
  text "DATE:" at 224.37,-97.64 h1.14
  text "PART NO.:" at 262.47,-97.64 h1.14
  text "REV:" at 315.81,-97.64 h1.14
  text "Altium Limited" at 191.35,-100.18 h1.78
  text ".PRINT_DATE" at 225.64,-100.688 h1.78
  text "12a Rodborough Rd" at 191.35,-102.72 h1.78
  text "Frenchs Forest" at 191.35,-105.26 h1.78
  text "FILE NAME:" at 224.37,-105.26 h1.14
  text "DWG NO:" at 262.47,-105.26 h1.14
  text "SCALE:" at 315.81,-105.26 h1.14
  text "NSW 2086" at 191.35,-107.8 h1.78
  text ".PCB_FILE_NAME_NO_PATH" at 225.64,-108.308 h1.78
  text "1" at -27.183,-113.769 h1.78
  text "2" at 21.856,-113.769 h1.78
  text "3" at 71.115,-113.769 h1.78
  text "4" at 120.408,-113.769 h1.78
  text "5" at 169.684,-113.769 h1.78
  text "6" at 218.706,-113.769 h1.78
  text "7" at 268.236,-113.769 h1.78
  text "8" at 317.258,-113.769 h1.78
Drill Drawing:
  drawing of 283 lines, arcs and shapes, not listed
  text "Symbol" at -37.023,127.905 h1.83
  text "Count" at -24.174,127.905 h1.83
  text "Hole Size" at -8.938,127.905 h1.83
  text "Plated" at 20.263,127.905 h1.83
  text "Hole Type" at 33.112,127.905 h1.83
  text "Drill Layer Pair" at 51.751,127.905 h1.83
  text "Via/Pad" at 89.84,127.905 h1.83
  text "Pad Shape" at 104.822,127.905 h1.83
  text "Template" at 123.765,127.905 h1.83
  text "Hole Length" at 156.013,127.905 h1.83
  text "Routed Path Length" at 185.215,127.905 h1.83
  text "2" at -24.174,124.095 h1.52
  text "11.81mil (0.300mm)" at -8.938,124.095 h1.52
  text "PTH" at 20.263,124.095 h1.52
  text "Round" at 33.112,124.095 h1.52
  text "Top Layer - Bottom Layer" at 51.751,124.095 h1.52
  text "Via" at 89.84,124.095 h1.52
  text "Rounded" at 104.822,124.095 h1.52
  text "v50h30m0mx0" at 123.765,124.095 h1.52
  text "-" at 156.013,124.095 h1.52
  text "-" at 185.215,124.095 h1.52
  text "1" at -24.174,120.285 h1.52
  text "20.00mil (0.508mm)" at -8.938,120.285 h1.52
  text "NPTH" at 20.263,120.285 h1.52
  text "Round" at 33.112,120.285 h1.52
  text "Top Layer - Bottom Layer" at 51.751,120.285 h1.52
  text "Pad" at 89.84,120.285 h1.52
  text "Rounded" at 104.822,120.285 h1.52
  text "c38hn51" at 123.765,120.285 h1.52
  text "-" at 156.013,120.285 h1.52
  text "-" at 185.215,120.285 h1.52
  text "168" at -24.174,116.475 h1.52
  text "23.62mil (0.600mm)" at -8.938,116.475 h1.52
  text "PTH" at 20.263,116.475 h1.52
  text "Round" at 33.112,116.475 h1.52
  text "Top Layer - Bottom Layer" at 51.751,116.475 h1.52
  text "(Mixed)" at 89.84,116.475 h1.52
  text "Rounded" at 104.822,116.475 h1.52
  text "(Mixed)" at 123.765,116.475 h1.52
  text "-" at 156.013,116.475 h1.52
  text "-" at 185.215,116.475 h1.52
  text "6" at -24.174,112.665 h1.52
  text "29.53mil (0.750mm)" at -8.938,112.665 h1.52
  text "PTH" at 20.263,112.665 h1.52
  text "Round" at 33.112,112.665 h1.52
  text "Top Layer - Bottom Layer" at 51.751,112.665 h1.52
  text "Pad" at 89.84,112.665 h1.52
  text "(Mixed)" at 104.822,112.665 h1.52
  text "(Mixed)" at 123.765,112.665 h1.52
  text "-" at 156.013,112.665 h1.52
  text "-" at 185.215,112.665 h1.52
  text "58" at -24.174,108.855 h1.52
  text "31.50mil (0.800mm)" at -8.938,108.855 h1.52
  text "PTH" at 20.263,108.855 h1.52
  text "Round" at 33.112,108.855 h1.52
  text "Top Layer - Bottom Layer" at 51.751,108.855 h1.52
  text "(Mixed)" at 89.84,108.855 h1.52
  text "Rounded" at 104.822,108.855 h1.52
  text "(Mixed)" at 123.765,108.855 h1.52
  text "-" at 156.013,108.855 h1.52
  text "-" at 185.215,108.855 h1.52
  text "95" at -24.174,105.045 h1.52
  text "35.43mil (0.900mm)" at -8.938,105.045 h1.52
  text "PTH" at 20.263,105.045 h1.52
  text "Round" at 33.112,105.045 h1.52
  text "Top Layer - Bottom Layer" at 51.751,105.045 h1.52
  text "Pad" at 89.84,105.045 h1.52
  text "(Mixed)" at 104.822,105.045 h1.52
  text "(Mixed)" at 123.765,105.045 h1.52
  text "-" at 156.013,105.045 h1.52
  text "-" at 185.215,105.045 h1.52
  text "2" at -24.174,101.235 h1.52
  text "39.37mil (1.000mm)" at -8.938,101.235 h1.52
  text "PTH" at 20.263,101.235 h1.52
  text "Slot" at 33.112,101.235 h1.52
  text "Top Layer - Bottom Layer" at 51.751,101.235 h1.52
  text "Pad" at 89.84,101.235 h1.52
  text "Rounded" at 104.822,101.235 h1.52
  text "(Mixed)" at 123.765,101.235 h1.52
  text "118.11mil (3.000mm)" at 156.013,101.235 h1.52
  text "78.74mil (2.000mm)" at 185.215,101.235 h1.52
  text "1" at -24.174,97.425 h1.52
  text "39.37mil (1.000mm)" at -8.938,97.425 h1.52
  text "PTH" at 20.263,97.425 h1.52
  text "Slot" at 33.112,97.425 h1.52
  text "Top Layer - Bottom Layer" at 51.751,97.425 h1.52
  text "Pad" at 89.84,97.425 h1.52
  text "Rounded" at 104.822,97.425 h1.52
  text "r200_450h100_350r100" at 123.765,97.425 h1.52
  text "137.79mil (3.500mm)" at 156.013,97.425 h1.52
  text "98.43mil (2.500mm)" at 185.215,97.425 h1.52
  text "3" at -24.174,93.615 h1.52
  text "43.31mil (1.100mm)" at -8.938,93.615 h1.52
  text "PTH" at 20.263,93.615 h1.52
  text "Round" at 33.112,93.615 h1.52
  text "Top Layer - Bottom Layer" at 51.751,93.615 h1.52
  text "Pad" at 89.84,93.615 h1.52
  text "Rounded" at 104.822,93.615 h1.52
  text "c200h110" at 123.765,93.615 h1.52
  text "-" at 156.013,93.615 h1.52
  text "-" at 185.215,93.615 h1.52
  text "4" at -24.174,89.805 h1.52
  text "98.43mil (2.500mm)" at -8.938,89.805 h1.52
  text "NPTH" at 20.263,89.805 h1.52
  text "Round" at 33.112,89.805 h1.52
  text "Top Layer - Bottom Layer" at 51.751,89.805 h1.52
  text "Pad" at 89.84,89.805 h1.52
  text "Rounded" at 104.822,89.805 h1.52
  text "c230hn250" at 123.765,89.805 h1.52
  text "-" at 156.013,89.805 h1.52
  text "-" at 185.215,89.805 h1.52
  text "4" at -24.174,85.995 h1.52
  text "129.92mil (3.300mm)" at -8.938,85.995 h1.52
  text "NPTH" at 20.263,85.995 h1.52
  text "Round" at 33.112,85.995 h1.52
  text "Top Layer - Bottom Layer" at 51.751,85.995 h1.52
  text "Pad" at 89.84,85.995 h1.52
  text "Rounded" at 104.822,85.995 h1.52
  text "(Mixed)" at 123.765,85.995 h1.52
  text "-" at 156.013,85.995 h1.52
  text "-" at 185.215,85.995 h1.52
  text "344 Total" at -24.174,82.185 h1.52
  text "Slot definitions :" at -37.023,78.503 h1.52
  text "Routed Path Length" at -10.793,78.503 h1.52
  text "= Calculated from tool start centre position to tool end centre position." at 17.215,78.503 h1.52
  text "Hole Length" at -10.793,75.963 h1.52
  text "= Routed Path Length + Tool Size = Slot length as defined in the PCB layout" at 6.804,75.963 h1.52
  text "Layer" at 34.969,-37.611 h1.52
  text "Name" at 45.38,-37.611 h1.52
  text "Material" at 68.996,-37.611 h1.52
  text "Thickness" at 90.834,-37.611 h1.52
  text "Constant" at 107.34,-37.611 h1.52
  text "Board Layer Stack" at 121.814,-37.611 h1.52
  text "Top Overlay" at 45.38,-40.659 h1.52
  text "Top Solder" at 45.38,-43.707 h1.52
  text "Solder Resist" at 68.996,-43.707 h1.52
  text "0.40mil" at 90.834,-43.707 h1.52
  text "3.5" at 107.34,-43.707 h1.52
  text "1" at 34.969,-46.755 h1.52
  text "Top Layer" at 45.38,-46.755 h1.52
  text "1.40mil" at 90.834,-46.755 h1.52
  text "Dielectric1" at 45.38,-49.803 h1.52
  text "FR-4" at 68.996,-49.803 h1.52
  text "62.00mil" at 90.834,-49.803 h1.52
  text "4.8" at 107.34,-49.803 h1.52
  text "2" at 34.969,-52.851 h1.52
  text "Bottom Layer" at 45.38,-52.851 h1.52
  text "1.40mil" at 90.834,-52.851 h1.52
  text "Bottom Solder" at 45.38,-55.899 h1.52
  text "Solder Resist" at 68.996,-55.899 h1.52
  text "0.40mil" at 90.834,-55.899 h1.52
  text "3.5" at 107.34,-55.899 h1.52
  text "Bottom Overlay" at 45.38,-58.947 h1.52

## Dimensions
0,0 to -0.005,50.5 on Dimensions
0,-0.005 to 180,-0.005 on Dimensions

## Text inside footprints (layer, text, board x,y; h text height)
C1: Top Overlay "+" at 171.869,21.359 h1.5 r180
C2: Top Overlay "+" at 171.869,15.759 h1.5 r180
C3: Top Overlay "+" at 171.869,10.159 h1.5 r180
HDR1: Top Overlay "10" at 80.676,43.656 h1; Top Overlay "9" at 81.565,46.196 h1; Top Overlay "1" at 99.303,46.204 h1; Top Overlay "2" at 99.103,43.504 h1
HDR2: Top Overlay "20" at 129.797,48.285 h1 r90; Top Overlay "19" at 129.797,40.665 h1 r90; Top Overlay "1" at 106.937,41.808 h1 r90; Top Overlay "2" at 106.937,48.285 h1 r90; Top Overlay "16" at 124.717,48.285 h1 r90; Top Overlay "12" at 119.637,48.285 h1 r90; Top Overlay "6" at 112.017,48.285 h1 r90; Top Overlay "15" at 124.717,40.665 h1 r90; Top Overlay "11" at 119.637,41.046 h1 r90; Top Overlay "5" at 112.017,41.554 h1 r90; Top Overlay "18" at 127.257,48.285 h1 r90; Top Overlay "17" at 127.257,40.665 h1 r90; Top Overlay "14" at 122.177,48.285 h1 r90; Top Overlay "13" at 122.177,40.665 h1 r90; Top Overlay "10" at 117.097,48.285 h1 r90; Top Overlay "9" at 117.097,41.554 h1 r90; Top Overlay "8" at 114.557,48.285 h1 r90; Top Overlay "7" at 114.557,41.554 h1 r90; Top Overlay "4" at 109.477,48.285 h1 r90; Top Overlay "3" at 109.477,41.554 h1 r90
HDR3: Top Overlay "3" at 145.037,41.554 h1 r90; Top Overlay "4" at 145.037,48.285 h1 r90; Top Overlay "7" at 150.117,41.554 h1 r90; Top Overlay "8" at 150.117,48.285 h1 r90; Top Overlay "9" at 152.657,41.554 h1 r90; Top Overlay "10" at 152.657,48.285 h1 r90; Top Overlay "13" at 157.737,40.665 h1 r90; Top Overlay "14" at 157.737,48.285 h1 r90; Top Overlay "17" at 162.817,40.665 h1 r90; Top Overlay "18" at 162.817,48.285 h1 r90; Top Overlay "5" at 147.577,41.554 h1 r90; Top Overlay "11" at 155.197,41.046 h1 r90; Top Overlay "15" at 160.277,40.665 h1 r90; Top Overlay "6" at 147.577,48.285 h1 r90; Top Overlay "12" at 155.197,48.285 h1 r90; Top Overlay "16" at 160.277,48.285 h1 r90; Top Overlay "2" at 142.497,48.285 h1 r90; Top Overlay "1" at 142.497,41.808 h1 r90; Top Overlay "19" at 165.357,40.665 h1 r90; Top Overlay "20" at 165.357,48.285 h1 r90
Logo5: Top Overlay "5V DC" at 171.824,38.414 h1.2
U3: Top Overlay "1" at 163.366,28.419 h0.8 r90; Top Overlay "3" at 163.391,33.394 h0.8 r90; Top Overlay "2" at 163.353,30.833 h0.8 r90
U4: Top Overlay "2" at 163.353,18.813 h0.8 r90; Top Overlay "3" at 163.391,21.374 h0.8 r90; Top Overlay "1" at 163.366,16.399 h0.8 r90